# EAGLE board Panel EKO1 (EAGLE 5.10), part 1 of 2
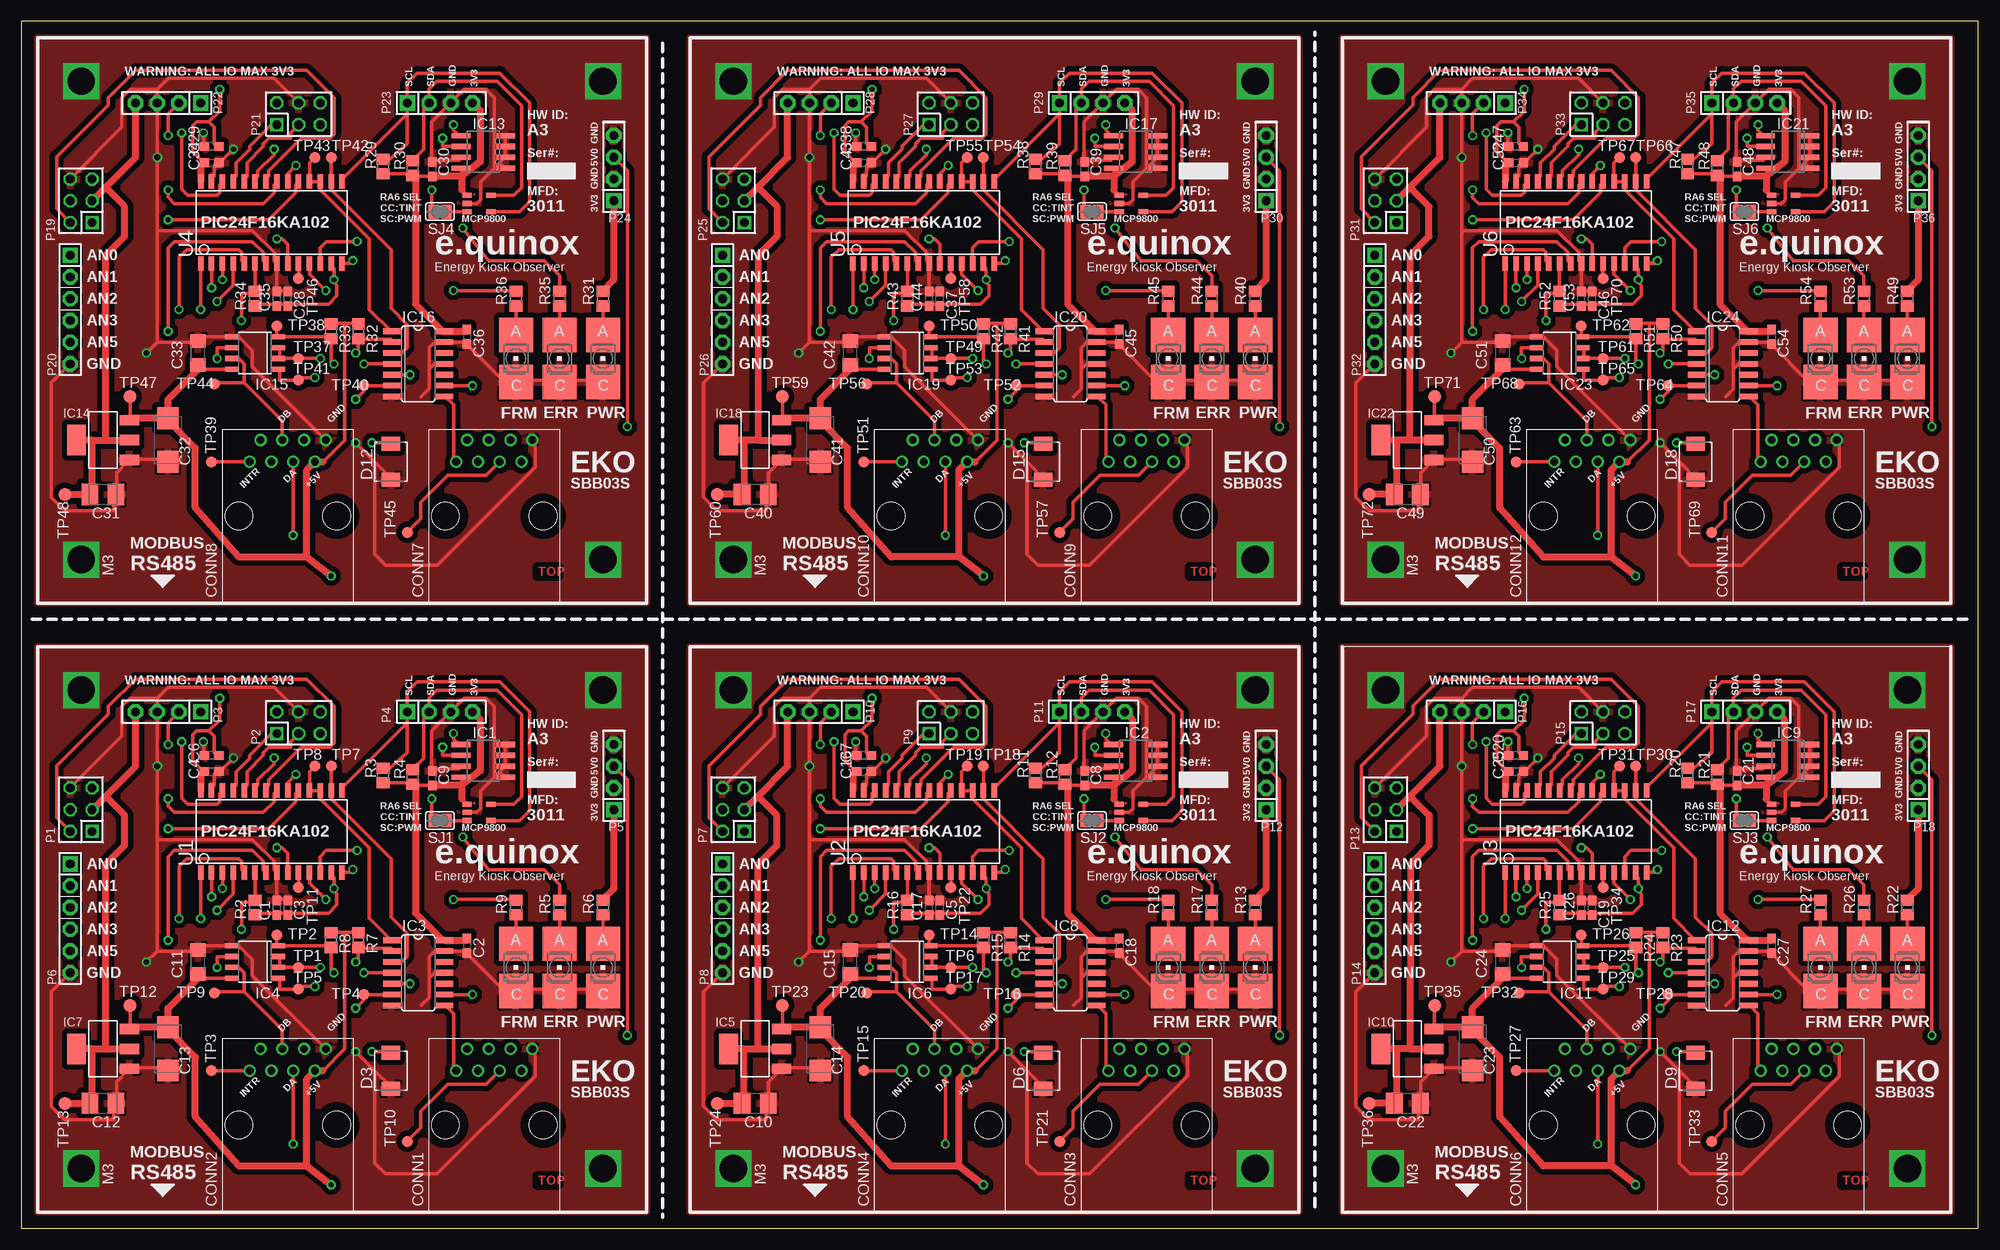
[diagram p0: board, top side]
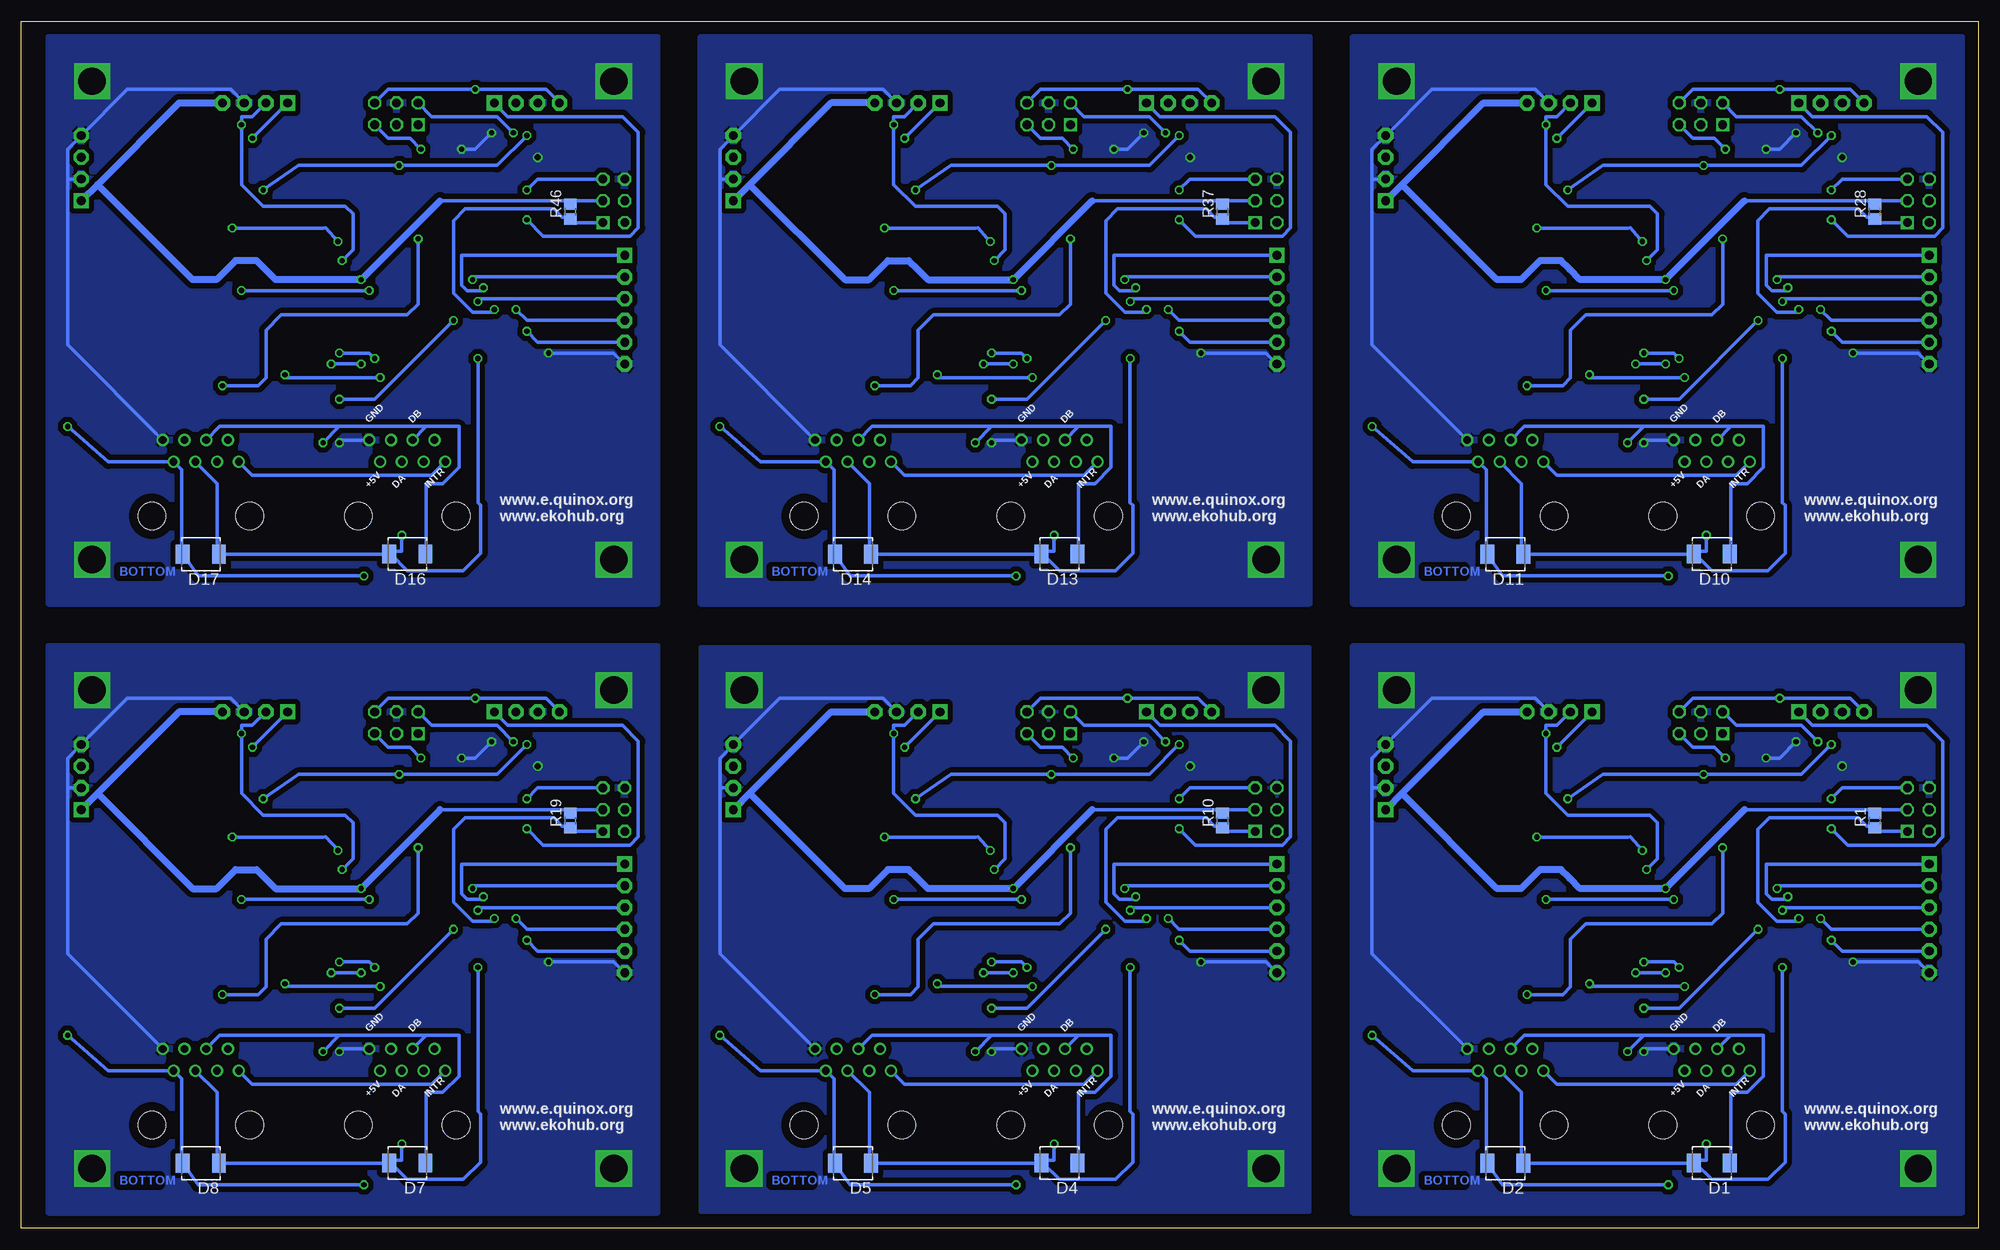
[diagram p1: board, bottom side, seen from below]

Size 228.6 x 140.97 mm. Coordinates in mm from the lower left corner, seen from the top.
Outline: 0,0 228.6,0 228.6,140.97 0,140.97 0,0
Copper layers (1*16): Top 0.035mm / dielectric 1.5mm / Bottom 0.035mm
Design rules "default": minimum track width 10mil, minimum drill 24mil, track to track 8mil, track to pad 8mil, pad to pad 8mil, via to via 8mil, smd to smd 8mil, copper to edge 40mil, drill to drill 8mil, minimum pad ring 10mil, minimum via ring 8mil, stop-mask expansion 4mil, vias tented up to drill 0mil, thermal gap 10mil

## Footprints (pad centres in the part's own frame; a part is rotated, then mirrored left to right if it is on the bottom)
C0603 = smd 1.1 x 1: 1 -0.85,0; 2 0.85,0
B/3528-21R = smd 1.95 x 2.5: + 1.525,0; - -1.525,0
C1206 = smd 1.6 x 1.8: 1 -1.4,0; 2 1.4,0
C/6032-28R = smd 2.55 x 2.5: + 2.525,0; - -2.525,0
MHRJJ8NFRA = drill 0.9 round: P$1 -4.445,6.35; P$2 -3.175,8.89; P$3 -1.905,6.35; P$4 -0.635,8.89; P$5 0.635,6.35; P$6 1.905,8.89; P$7 3.175,6.35; P$8 4.445,8.89 | hole 3.25: -5.715,0; 5.715,0
SMB = smd 1.62 x 2.18: 1 -2.11,0; 2 2.11,0
SO-08 = smd 0.6 x 2.2: 1 -1.905,-2.6; 2 -0.635,-2.6; 3 0.635,-2.6; 4 1.905,-2.6; 5 1.905,2.6; 6 0.635,2.6; 7 -0.635,2.6; 8 -1.905,2.6
SO14 = smd 0.66 x 2.032: 1 -3.81,-3.073; 2 -2.54,-3.073; 3 -1.27,-3.073; 4 0,-3.073; 5 1.27,-3.073; 6 2.54,-3.073; 7 3.81,-3.073; 8 3.81,3.073; 9 2.54,3.073; 10 1.27,3.073; 11 0,3.073; 12 -1.27,3.073; 13 -2.54,3.073; 14 -3.81,3.073
D_R-PDSO-G8 = smd 0.6 x 1.5: 1 -1.905,-2.75; 2 -0.635,-2.75; 3 0.635,-2.75; 4 1.905,-2.75; 5 1.905,2.75; 6 0.635,2.75; 7 -0.635,2.75; 8 -1.905,2.75
SOT223 = smd 1.219 x 2.235: 1 -2.311,-3.099; 2 0,-3.099; 3 2.311,-3.099 | smd 3.6 x 2.2: 4 0,3.099
P-LCC-2 = smd 4 x 4: A 0,2.75; C 0,-2.75
DIL-100-2X03 = drill 1.016 square: 1 -2.54,-1.27 | drill 1.016 octagon: 2 -2.54,1.27; 3 0,-1.27; 4 0,1.27; 5 2.54,-1.27; 6 2.54,1.27
SIP-100-04-40 = drill 1.016 pad 1.778 square: 1 -3.81,0 | drill 1.016 pad 1.778 octagon: 2 -1.27,0; 3 1.27,0; 4 3.81,0
SIP-100-06-40 = drill 1.016 pad 1.778 square: 1 -6.35,0 | drill 1.016 pad 1.778 octagon: 2 -3.81,0; 3 -1.27,0; 4 1.27,0; 5 3.81,0; 6 6.35,0
R0805 = smd 1.3 x 1.5: 1 -0.85,0; 2 0.85,0
SJ = smd 1.168 x 1.6: 1 -0.762,0; 2 0.762,0
TP13R = smd 1.3 x 1.3: TP 0,0
TP15R = smd 1.5 x 1.5: TP 0,0
SO28W = smd 0.65 x 1.7: 1 -7.62,-4.78; 2 -6.35,-4.78; 3 -5.08,-4.78; 4 -3.81,-4.78; 5 -2.54,-4.78; 6 -1.27,-4.78; 7 0,-4.78; 8 1.27,-4.78; 9 2.54,-4.78; 10 3.81,-4.78; 11 5.08,-4.78; 12 6.35,-4.78; 13 7.62,-4.78; 14 8.89,-4.78; 15 8.89,4.78; 16 7.62,4.78; 17 6.35,4.78; 18 5.08,4.78; 19 3.81,4.78; 20 2.54,4.78; 21 1.27,4.78; 22 0,4.78; 23 -1.27,4.78; 24 -2.54,4.78; 25 -3.81,4.78; 26 -5.08,4.78; 27 -6.35,4.78; 28 -7.62,4.78
SOT-23-5 = smd 0.6 x 1.1: ALERT 1.9,0; GND 0.95,0; SCLK 1.9,2.8; SDA 0,2.8; VDD 0,0

## Placement (x,y rotation side)
C1  [C0603]  29.84,37.47 90 top
C2  [C0603]  52.07,33.02 270 top
C3  [C0603]  31.11,37.47 90 top
C4  [C0603]  22.23,53.34 0 top
C5  [C0603]  107.31,37.47 90 top
C6  [C0603]  22.23,55.24 180 top
C7  [C0603]  98.42,55.24 180 top
C8  [C0603]  124.23,52.59 90 top
C9  [C0603]  48.03,52.59 90 top
C10  100uF  [B/3528-21R]  85.72,14.61 180 top
C11  0.1uF  [C1206]  20.64,31.11 90 top
C12  100uF  [B/3528-21R]  9.53,14.61 180 top
C13  10uF  [C/6032-28R]  17.14,20.95 90 top
C14  10uF  [C/6032-28R]  93.34,20.95 90 top
C15  0.1uF  [C1206]  96.84,31.11 90 top
C16  [C0603]  98.42,53.34 0 top
C17  [C0603]  106.05,37.47 90 top
C18  [C0603]  128.27,33.02 270 top
C19  [C0603]  183.51,37.47 90 top
C20  [C0603]  174.62,55.24 180 top
C21  [C0603]  200.43,52.59 90 top
C22  100uF  [B/3528-21R]  161.93,14.61 180 top
C23  10uF  [C/6032-28R]  169.54,20.95 90 top
C24  0.1uF  [C1206]  173.04,31.11 90 top
C25  [C0603]  174.62,53.34 0 top
C26  [C0603]  182.25,37.47 90 top
C27  [C0603]  204.47,33.02 270 top
C28  [C0603]  31.11,108.58 90 top
C29  [C0603]  22.23,126.36 180 top
C30  [C0603]  48.03,123.71 90 top
C31  100uF  [B/3528-21R]  9.53,85.72 180 top
C32  10uF  [C/6032-28R]  17.14,92.08 90 top
C33  0.1uF  [C1206]  20.64,102.23 90 top
C34  [C0603]  22.23,124.46 0 top
C35  [C0603]  29.84,108.58 90 top
C36  [C0603]  52.07,104.14 270 top
C37  [C0603]  107.31,108.58 90 top
C38  [C0603]  98.42,126.36 180 top
C39  [C0603]  124.23,123.71 90 top
C40  100uF  [B/3528-21R]  85.72,85.72 180 top
C41  10uF  [C/6032-28R]  93.34,92.08 90 top
C42  0.1uF  [C1206]  96.84,102.23 90 top
C43  [C0603]  98.42,124.46 0 top
C44  [C0603]  106.05,108.58 90 top
C45  [C0603]  128.27,104.14 270 top
C46  [C0603]  183.51,108.58 90 top
C47  [C0603]  174.62,126.36 180 top
C48  [C0603]  200.43,123.71 90 top
C49  100uF  [B/3528-21R]  161.93,85.72 180 top
C50  10uF  [C/6032-28R]  169.54,92.08 90 top
C51  0.1uF  [C1206]  173.04,102.23 90 top
C52  [C0603]  174.62,124.46 0 top
C53  [C0603]  182.25,108.58 90 top
C54  [C0603]  204.47,104.14 270 top
CONN1  MHRJJ88NFRA  [MHRJJ8NFRA]  55.24,12.06 0 top
CONN2  MHRJJ88NFRA  [MHRJJ8NFRA]  31.11,12.06 0 top
CONN3  MHRJJ88NFRA  [MHRJJ8NFRA]  131.44,12.06 0 top
CONN4  MHRJJ88NFRA  [MHRJJ8NFRA]  107.31,12.06 0 top
CONN5  MHRJJ88NFRA  [MHRJJ8NFRA]  207.65,12.06 0 top
CONN6  MHRJJ88NFRA  [MHRJJ8NFRA]  183.51,12.06 0 top
CONN7  MHRJJ88NFRA  [MHRJJ8NFRA]  55.24,83.19 0 top
CONN8  MHRJJ88NFRA  [MHRJJ8NFRA]  31.11,83.19 0 top
CONN9  MHRJJ88NFRA  [MHRJJ8NFRA]  131.44,83.19 0 top
CONN10  MHRJJ88NFRA  [MHRJJ8NFRA]  107.31,83.19 0 top
CONN11  MHRJJ88NFRA  [MHRJJ8NFRA]  207.65,83.19 0 top
CONN12  MHRJJ88NFRA  [MHRJJ8NFRA]  183.51,83.19 0 top
D1  P6SMB12CA  [SMB]  31.12,7.63 180 bottom
D2  P6SMB12CA  [SMB]  55.23,7.61 180 bottom
D3  P6SMB12CA  [SMB]  43.18,18.41 90 top
D4  P6SMB12CA  [SMB]  107.32,7.63 180 bottom
D5  P6SMB12CA  [SMB]  131.43,7.61 180 bottom
D6  P6SMB12CA  [SMB]  119.38,18.41 90 top
D7  P6SMB12CA  [SMB]  183.52,7.63 180 bottom
D8  P6SMB12CA  [SMB]  207.63,7.61 180 bottom
D9  P6SMB12CA  [SMB]  195.58,18.41 90 top
D10  P6SMB12CA  [SMB]  31.12,78.75 180 bottom
D11  P6SMB12CA  [SMB]  55.23,78.73 180 bottom
D12  P6SMB12CA  [SMB]  43.18,89.53 90 top
D13  P6SMB12CA  [SMB]  107.32,78.75 180 bottom
D14  P6SMB12CA  [SMB]  131.43,78.73 180 bottom
D15  P6SMB12CA  [SMB]  119.38,89.53 90 top
D16  P6SMB12CA  [SMB]  183.52,78.75 180 bottom
D17  P6SMB12CA  [SMB]  207.63,78.73 180 bottom
D18  P6SMB12CA  [SMB]  195.58,89.53 90 top
IC1  24AA01SN  [SO-08]  53.98,54.61 90 top
IC2  24AA01SN  [SO-08]  130.18,54.61 90 top
IC3  7407D  [SO14]  46.35,29.84 270 top
IC4  SP483E  [D_R-PDSO-G8]  27.3,31.11 90 top
IC5  TLV1117  [SOT223]  85.72,20.95 90 top
IC6  SP483E  [D_R-PDSO-G8]  103.5,31.11 90 top
IC7  TLV1117  [SOT223]  9.53,20.95 90 top
IC8  7407D  [SO14]  122.56,29.84 270 top
IC9  24AA01SN  [SO-08]  206.38,54.61 90 top
IC10  TLV1117  [SOT223]  161.93,20.95 90 top
IC11  SP483E  [D_R-PDSO-G8]  179.71,31.11 90 top
IC12  7407D  [SO14]  198.75,29.84 270 top
IC13  24AA01SN  [SO-08]  53.98,125.73 90 top
IC14  TLV1117  [SOT223]  9.53,92.08 90 top
IC15  SP483E  [D_R-PDSO-G8]  27.3,102.23 90 top
IC16  7407D  [SO14]  46.35,100.97 270 top
IC17  24AA01SN  [SO-08]  130.18,125.73 90 top
IC18  TLV1117  [SOT223]  85.72,92.08 90 top
IC19  SP483E  [D_R-PDSO-G8]  103.5,102.23 90 top
IC20  7407D  [SO14]  122.56,100.97 270 top
IC21  24AA01SN  [SO-08]  206.38,125.73 90 top
IC22  TLV1117  [SOT223]  161.93,92.08 90 top
IC23  SP483E  [D_R-PDSO-G8]  179.71,102.23 90 top
IC24  7407D  [SO14]  198.75,100.97 270 top
LED1  RED  [P-LCC-2]  62.87,30.48 0 top
LED2  AMBER  [P-LCC-2]  57.78,30.48 0 top
LED3  GREEN  [P-LCC-2]  144.15,30.48 0 top
LED4  RED  [P-LCC-2]  139.06,30.48 0 top
LED5  AMBER  [P-LCC-2]  133.99,30.48 0 top
LED6  GREEN  [P-LCC-2]  220.34,30.48 0 top
LED7  RED  [P-LCC-2]  215.26,30.48 0 top
LED8  GREEN  [P-LCC-2]  67.94,30.48 0 top
LED9  AMBER  [P-LCC-2]  210.19,30.48 0 top
LED10  GREEN  [P-LCC-2]  67.94,101.6 0 top
LED11  RED  [P-LCC-2]  62.87,101.6 0 top
LED12  AMBER  [P-LCC-2]  57.78,101.6 0 top
LED13  GREEN  [P-LCC-2]  144.15,101.6 0 top
LED14  RED  [P-LCC-2]  139.06,101.6 0 top
LED15  AMBER  [P-LCC-2]  133.99,101.6 0 top
LED16  GREEN  [P-LCC-2]  220.34,101.6 0 top
LED17  RED  [P-LCC-2]  215.26,101.6 0 top
LED18  AMBER  [P-LCC-2]  210.19,101.6 0 top
P1  ICSP  [DIL-100-2X03]  6.99,48.9 90 top
P2  ANALOG IN 2  [DIL-100-2X03]  32.38,59.05 0 top
P3  COMP  [SIP-100-04-40]  17.14,60.33 180 top
P4  I2C1  [SIP-100-04-40]  48.9,60.33 0 top
P5  PWR  [SIP-100-04-40]  69.22,52.7 90 top
P6  ANALOG IN  [SIP-100-06-40]  5.71,36.2 270 top
P7  ICSP  [DIL-100-2X03]  83.19,48.9 90 top
P8  ANALOG IN  [SIP-100-06-40]  81.92,36.2 270 top
P9  ANALOG IN 2  [DIL-100-2X03]  108.58,59.05 0 top
P10  COMP  [SIP-100-04-40]  93.34,60.33 180 top
P11  I2C1  [SIP-100-04-40]  125.09,60.33 0 top
P12  PWR  [SIP-100-04-40]  145.41,52.7 90 top
P13  ICSP  [DIL-100-2X03]  159.38,48.9 90 top
P14  ANALOG IN  [SIP-100-06-40]  158.12,36.2 270 top
P15  ANALOG IN 2  [DIL-100-2X03]  184.78,59.05 0 top
P16  COMP  [SIP-100-04-40]  169.54,60.33 180 top
P17  I2C1  [SIP-100-04-40]  201.29,60.33 0 top
P18  PWR  [SIP-100-04-40]  221.62,52.7 90 top
P19  ICSP  [DIL-100-2X03]  6.99,120.02 90 top
P20  ANALOG IN  [SIP-100-06-40]  5.71,107.31 270 top
P21  ANALOG IN 2  [DIL-100-2X03]  32.38,130.18 0 top
P22  COMP  [SIP-100-04-40]  17.14,131.44 180 top
P23  I2C1  [SIP-100-04-40]  48.9,131.44 0 top
P24  PWR  [SIP-100-04-40]  69.22,123.83 90 top
P25  ICSP  [DIL-100-2X03]  83.19,120.02 90 top
P26  ANALOG IN  [SIP-100-06-40]  81.92,107.31 270 top
P27  ANALOG IN 2  [DIL-100-2X03]  108.58,130.18 0 top
P28  COMP  [SIP-100-04-40]  93.34,131.44 180 top
P29  I2C1  [SIP-100-04-40]  125.09,131.44 0 top
P30  PWR  [SIP-100-04-40]  145.41,123.83 90 top
P31  ICSP  [DIL-100-2X03]  159.38,120.02 90 top
P32  ANALOG IN  [SIP-100-06-40]  158.12,107.31 270 top
P33  ANALOG IN 2  [DIL-100-2X03]  184.78,130.18 0 top
P34  COMP  [SIP-100-04-40]  169.54,131.44 180 top
P35  I2C1  [SIP-100-04-40]  201.29,131.44 0 top
P36  PWR  [SIP-100-04-40]  221.62,123.83 90 top
R1  10k  [R0805]  12.06,47.62 90 bottom
R2  2.7K  [R0805]  27.3,37.47 90 top
R3  [R0805]  42.27,52.91 270 top
R4  [R0805]  45.72,52.7 270 top
R5  390  [R0805]  62.87,37.47 90 top
R6  390  [R0805]  67.94,37.47 90 top
R7  4.7k  [R0805]  39.37,33.66 270 top
R8  4.7k  [R0805]  36.2,33.66 270 top
R9  390  [R0805]  57.78,37.47 90 top
R10  10k  [R0805]  88.27,47.62 90 bottom
R11  [R0805]  118.47,52.91 270 top
R12  [R0805]  121.92,52.7 270 top
R13  390  [R0805]  144.15,37.47 90 top
R14  4.7k  [R0805]  115.57,33.66 270 top
R15  4.7k  [R0805]  112.39,33.66 270 top
R16  2.7K  [R0805]  103.5,37.47 90 top
R17  390  [R0805]  139.06,37.47 90 top
R18  390  [R0805]  133.99,37.47 90 top
R19  10k  [R0805]  164.47,47.62 90 bottom
R20  [R0805]  194.67,52.91 270 top
R21  [R0805]  198.12,52.7 270 top
R22  390  [R0805]  220.34,37.47 90 top
R23  4.7k  [R0805]  191.77,33.66 270 top
R24  4.7k  [R0805]  188.59,33.66 270 top
R25  2.7K  [R0805]  179.71,37.47 90 top
R26  390  [R0805]  215.26,37.47 90 top
R27  390  [R0805]  210.19,37.47 90 top
R28  10k  [R0805]  12.06,118.75 90 bottom
R29  [R0805]  42.27,124.03 270 top
R30  [R0805]  45.72,123.83 270 top
R31  390  [R0805]  67.94,108.58 90 top
R32  4.7k  [R0805]  39.37,104.78 270 top
R33  4.7k  [R0805]  36.2,104.78 270 top
R34  2.7K  [R0805]  27.3,108.58 90 top
R35  390  [R0805]  62.87,108.58 90 top
R36  390  [R0805]  57.78,108.58 90 top
R37  10k  [R0805]  88.27,118.75 90 bottom
R38  [R0805]  118.47,124.03 270 top
R39  [R0805]  121.92,123.83 270 top
R40  390  [R0805]  144.15,108.58 90 top
R41  4.7k  [R0805]  115.57,104.78 270 top
R42  4.7k  [R0805]  112.39,104.78 270 top
R43  2.7K  [R0805]  103.5,108.58 90 top
R44  390  [R0805]  139.06,108.58 90 top
R45  390  [R0805]  133.99,108.58 90 top
R46  10k  [R0805]  164.47,118.75 90 bottom
R47  [R0805]  194.67,124.03 270 top
R48  [R0805]  198.12,123.83 270 top
R49  390  [R0805]  220.34,108.58 90 top
R50  4.7k  [R0805]  191.77,104.78 270 top
R51  4.7k  [R0805]  188.59,104.78 270 top
R52  2.7K  [R0805]  179.71,108.58 90 top
R53  390  [R0805]  215.26,108.58 90 top
R54  390  [R0805]  210.19,108.58 90 top
SJ1  [SJ]  48.9,47.62 0 top
SJ2  [SJ]  125.09,47.62 0 top
SJ3  [SJ]  201.29,47.62 0 top
SJ4  [SJ]  48.9,118.75 0 top
SJ5  [SJ]  125.09,118.75 0 top
SJ6  [SJ]  201.29,118.75 0 top
TP1  TPTP13R  [TP13R]  32.38,30.48 0 top
TP2  TPTP13R  [TP13R]  29.84,34.29 0 top
TP3  TPTP13R  [TP13R]  22.23,18.41 0 top
TP4  TPTP13R  [TP13R]  40.01,27.3 0 top
TP5  TPTP13R  [TP13R]  32.38,27.94 0 top
TP6  TPTP13R  [TP13R]  108.58,30.48 0 top
TP7  TPTP13R  [TP13R]  36.2,53.98 0 top
TP8  TPTP13R  [TP13R]  34.29,53.98 0 top
TP9  TPTP13R  [TP13R]  22.56,27.48 0 top
TP10  TPTP13R  [TP13R]  45.09,10.16 0 top
TP11  TPTP13R  [TP13R]  32.38,39.8 0 top
TP12  TPTP15R  [TP15R]  12.7,26.04 0 top
TP13  3V3  [TP15R]  5.08,14.61 0 top
TP14  TPTP13R  [TP13R]  106.05,34.29 0 top
TP15  TPTP13R  [TP13R]  98.42,18.41 0 top
TP16  TPTP13R  [TP13R]  116.2,27.3 0 top
TP17  TPTP13R  [TP13R]  108.58,27.94 0 top
TP18  TPTP13R  [TP13R]  112.39,53.98 0 top
TP19  TPTP13R  [TP13R]  110.49,53.98 0 top
TP20  TPTP13R  [TP13R]  98.76,27.48 0 top
TP21  TPTP13R  [TP13R]  121.28,10.16 0 top
TP22  TPTP13R  [TP13R]  108.58,39.8 0 top
TP23  TPTP15R  [TP15R]  88.9,26.04 0 top
TP24  3V3  [TP15R]  81.28,14.61 0 top
TP25  TPTP13R  [TP13R]  184.78,30.48 0 top
TP26  TPTP13R  [TP13R]  182.25,34.29 0 top
TP27  TPTP13R  [TP13R]  174.62,18.41 0 top
TP28  TPTP13R  [TP13R]  192.41,27.3 0 top
TP29  TPTP13R  [TP13R]  184.78,27.94 0 top
TP30  TPTP13R  [TP13R]  188.59,53.98 0 top
TP31  TPTP13R  [TP13R]  186.69,53.98 0 top
TP32  TPTP13R  [TP13R]  174.96,27.48 0 top
TP33  TPTP13R  [TP13R]  197.49,10.16 0 top
TP34  TPTP13R  [TP13R]  184.78,39.8 0 top
TP35  TPTP15R  [TP15R]  165.1,26.04 0 top
TP36  3V3  [TP15R]  157.48,14.61 0 top
TP37  TPTP13R  [TP13R]  32.38,101.6 0 top
TP38  TPTP13R  [TP13R]  29.84,105.41 0 top
TP39  TPTP13R  [TP13R]  22.23,89.53 0 top
TP40  TPTP13R  [TP13R]  40.01,98.42 0 top
TP41  TPTP13R  [TP13R]  32.38,99.06 0 top
TP42  TPTP13R  [TP13R]  36.2,125.09 0 top
TP43  TPTP13R  [TP13R]  34.29,125.09 0 top
TP44  TPTP13R  [TP13R]  22.56,98.6 0 top
TP45  TPTP13R  [TP13R]  45.09,81.28 0 top
TP46  TPTP13R  [TP13R]  32.38,110.92 0 top
TP47  TPTP15R  [TP15R]  12.7,97.16 0 top
TP48  3V3  [TP15R]  5.08,85.72 0 top
TP49  TPTP13R  [TP13R]  108.58,101.6 0 top
TP50  TPTP13R  [TP13R]  106.05,105.41 0 top
TP51  TPTP13R  [TP13R]  98.42,89.53 0 top
TP52  TPTP13R  [TP13R]  116.2,98.42 0 top
TP53  TPTP13R  [TP13R]  108.58,99.06 0 top
TP54  TPTP13R  [TP13R]  112.39,125.09 0 top
TP55  TPTP13R  [TP13R]  110.49,125.09 0 top
TP56  TPTP13R  [TP13R]  98.76,98.6 0 top
TP57  TPTP13R  [TP13R]  121.28,81.28 0 top
TP58  TPTP13R  [TP13R]  108.58,110.92 0 top
TP59  TPTP15R  [TP15R]  88.9,97.16 0 top
TP60  3V3  [TP15R]  81.28,85.72 0 top
TP61  TPTP13R  [TP13R]  184.78,101.6 0 top
TP62  TPTP13R  [TP13R]  182.25,105.41 0 top
TP63  TPTP13R  [TP13R]  174.62,89.53 0 top
TP64  TPTP13R  [TP13R]  192.41,98.42 0 top
TP65  TPTP13R  [TP13R]  184.78,99.06 0 top
TP66  TPTP13R  [TP13R]  188.59,125.09 0 top
TP67  TPTP13R  [TP13R]  186.69,125.09 0 top
TP68  TPTP13R  [TP13R]  174.96,98.6 0 top
TP69  TPTP13R  [TP13R]  197.49,81.28 0 top
TP70  TPTP13R  [TP13R]  184.78,110.92 0 top
TP71  TPTP15R  [TP15R]  165.1,97.16 0 top
TP72  3V3  [TP15R]  157.48,85.72 0 top
U1  PIC24F16KA102-I/SPSOIC  [SO28W]  28.57,46.35 0 top
U2  PIC24F16KA102-I/SPSOIC  [SO28W]  104.78,46.35 0 top
U3  PIC24F16KA102-I/SPSOIC  [SO28W]  180.97,46.35 0 top
U4  PIC24F16KA102-I/SPSOIC  [SO28W]  28.57,117.47 0 top
U5  PIC24F16KA102-I/SPSOIC  [SO28W]  104.78,117.47 0 top
U6  PIC24F16KA102-I/SPSOIC  [SO28W]  180.97,117.47 0 top
U$1  MCP9800  [SOT-23-5]  52.07,49.53 270 top
U$2  MCP9800  [SOT-23-5]  128.27,49.53 270 top
U$3  MCP9800  [SOT-23-5]  204.47,49.53 270 top
U$4  MCP9800  [SOT-23-5]  52.07,120.65 270 top
U$5  MCP9800  [SOT-23-5]  128.27,120.65 270 top
U$6  MCP9800  [SOT-23-5]  204.47,120.65 270 top

## Library data of the parts
C1-C54 R1-R54 = resistor
CONN1-CONN12 U1-U6 = eko-parts
D1-D18 = _hhn_suppressor_SMAJ_SM6T_P6SMB
IC1 IC2 IC9 IC13 IC17 IC21 = microchip; MF: MICROCHIP; MPN: 24AA01/SN; OC_FARNELL: 1331268; OC_NEWARK: 89C9792
IC3 IC8 IC12 IC16 IC20 IC24 = 74xx-eu
IC4 IC6 IC11 IC15 IC19 IC23 = 751xx
IC5 IC7 IC10 IC14 IC18 IC22 = SparkFun
LED1-LED18 = led
P1-P36 = con-headers-jp
SJ1-SJ6 = jumper
TP1-TP72 = testpad
U$1-U$6 = atmospheric

## Nets
0V: C1.2 C2.2 C3.2 C4.2 C6.2 C9.2 C11.2 C12.- C13.- CONN1.P$8 CONN2.P$8 D3.1 IC1.1 IC1.2 IC1.3 IC1.4 IC1.7 IC3.7 IC3.11 IC3.13 IC4.5 IC7.1 LED1.C LED2.C LED8.C P1.6 P2.4 P3.3 P4.3 P5.2 P5.4 P6.6 U1.8 U1.27 U$1.GND
0V1: C5.2 C7.2 C8.2 C10.- C14.- C15.2 C16.2 C17.2 C18.2 CONN3.P$8 CONN4.P$8 D6.1 IC2.1 IC2.2 IC2.3 IC2.4 IC2.7 IC5.1 IC6.5 IC8.7 IC8.11 IC8.13 LED3.C LED4.C LED5.C P7.6 P8.6 P9.4 P10.3 P11.3 P12.2 P12.4 U2.8 U2.27 U$2.GND
0V2: C19.2 C20.2 C21.2 C22.- C23.- C24.2 C25.2 C26.2 C27.2 CONN5.P$8 CONN6.P$8 D9.1 IC9.1 IC9.2 IC9.3 IC9.4 IC9.7 IC10.1 IC11.5 IC12.7 IC12.11 IC12.13 LED6.C LED7.C LED9.C P13.6 P14.6 P15.4 P16.3 P17.3 P18.2 P18.4 U3.8 U3.27 U$3.GND
0V3: C28.2 C29.2 C30.2 C31.- C32.- C33.2 C34.2 C35.2 C36.2 CONN7.P$8 CONN8.P$8 D12.1 IC13.1 IC13.2 IC13.3 IC13.4 IC13.7 IC14.1 IC15.5 IC16.7 IC16.11 IC16.13 LED10.C LED11.C LED12.C P19.6 P20.6 P21.4 P22.3 P23.3 P24.2 P24.4 U4.8 U4.27 U$4.GND
0V4: C37.2 C38.2 C39.2 C40.- C41.- C42.2 C43.2 C44.2 C45.2 CONN9.P$8 CONN10.P$8 D15.1 IC17.1 IC17.2 IC17.3 IC17.4 IC17.7 IC18.1 IC19.5 IC20.7 IC20.11 IC20.13 LED13.C LED14.C LED15.C P25.6 P26.6 P27.4 P28.3 P29.3 P30.2 P30.4 U5.8 U5.27 U$5.GND
0V5: C46.2 C47.2 C48.2 C49.- C50.- C51.2 C52.2 C53.2 C54.2 CONN11.P$8 CONN12.P$8 D18.1 IC21.1 IC21.2 IC21.3 IC21.4 IC21.7 IC22.1 IC23.5 IC24.7 IC24.11 IC24.13 LED16.C LED17.C LED18.C P31.6 P32.6 P33.4 P34.3 P35.3 P36.2 P36.4 U6.8 U6.27 U$6.GND
!MCLR!: P1.1 R1.1 U1.1
!MCLR!1: P7.1 R10.1 U2.1
!MCLR!2: P13.1 R19.1 U3.1
!MCLR!3: P19.1 R28.1 U4.1
!MCLR!4: P25.1 R37.1 U5.1
!MCLR!5: P31.1 R46.1 U6.1
!UART_RTS!: IC3.1 TP8.TP U1.17 U1.18
!UART_RTS!1: IC8.1 TP19.TP U2.17 U2.18
!UART_RTS!2: IC12.1 TP31.TP U3.17 U3.18
!UART_RTS!3: IC16.1 TP43.TP U4.17 U4.18
!UART_RTS!4: IC20.1 TP55.TP U5.17 U5.18
!UART_RTS!5: IC24.1 TP67.TP U6.17 U6.18
+3V1: C5.1 C7.1 C8.1 C10.+ C16.1 C17.1 C18.1 IC2.8 IC5.2 IC5.4 IC8.14 P7.3 P9.6 P10.4 P11.4 P12.1 R10.2 R11.2 R12.2 R13.2 R16.1 TP24.TP U2.13 U2.28 U$2.VDD
+3V2: C19.1 C20.1 C21.1 C22.+ C25.1 C26.1 C27.1 IC9.8 IC10.2 IC10.4 IC12.14 P13.3 P15.6 P16.4 P17.4 P18.1 R19.2 R20.2 R21.2 R22.2 R25.1 TP36.TP U3.13 U3.28 U$3.VDD
+3V3: C1.1 C2.1 C3.1 C4.1 C6.1 C9.1 C12.+ IC1.8 IC3.14 IC7.2 IC7.4 P1.3 P2.6 P3.4 P4.4 P5.1 R1.2 R2.1 R3.2 R4.2 R6.2 TP13.TP U1.13 U1.28 U$1.VDD
+3V4: C28.1 C29.1 C30.1 C31.+ C34.1 C35.1 C36.1 IC13.8 IC14.2 IC14.4 IC16.14 P19.3 P21.6 P22.4 P23.4 P24.1 R28.2 R29.2 R30.2 R31.2 R34.1 TP48.TP U4.13 U4.28 U$4.VDD
+3V5: C37.1 C38.1 C39.1 C40.+ C43.1 C44.1 C45.1 IC17.8 IC18.2 IC18.4 IC20.14 P25.3 P27.6 P28.4 P29.4 P30.1 R37.2 R38.2 R39.2 R40.2 R43.1 TP60.TP U5.13 U5.28 U$5.VDD
+3V6: C46.1 C47.1 C48.1 C49.+ C52.1 C53.1 C54.1 IC21.8 IC22.2 IC22.4 IC24.14 P31.3 P33.6 P34.4 P35.4 P36.1 R46.2 R47.2 R48.2 R49.2 R52.1 TP72.TP U6.13 U6.28 U$6.VDD
+5V: C11.1 C13.+ CONN1.P$7 CONN2.P$7 D2.2 IC4.8 IC7.3 P5.3 R7.1 R8.1 TP12.TP
+5V1: C14.+ C15.1 CONN3.P$7 CONN4.P$7 D5.2 IC5.3 IC6.8 P12.3 R14.1 R15.1 TP23.TP
+5V2: C23.+ C24.1 CONN5.P$7 CONN6.P$7 D8.2 IC10.3 IC11.8 P18.3 R23.1 R24.1 TP35.TP
+5V3: C32.+ C33.1 CONN7.P$7 CONN8.P$7 D11.2 IC14.3 IC15.8 P24.3 R32.1 R33.1 TP47.TP
+5V4: C41.+ C42.1 CONN9.P$7 CONN10.P$7 D14.2 IC18.3 IC19.8 P30.3 R41.1 R42.1 TP59.TP
+5V5: C50.+ C51.1 CONN11.P$7 CONN12.P$7 D17.2 IC22.3 IC23.8 P36.3 R50.1 R51.1 TP71.TP
AN0: P6.1 U1.2
AN1: P6.2 U1.3
AN2: P6.3 U1.4
AN3: P6.4 U1.5
AN4: P8.5 U2.7
AN5: P6.5 U1.7
AN6: P8.2 U2.3
AN7: P8.1 U2.2
AN8: P8.3 U2.4
AN9: P8.4 U2.5
AN10: P2.1 U1.25
AN11: P2.3 U1.24
AN12: P2.5 U1.23
AN13: P9.3 U2.24
AN14: P9.5 U2.23
AN15: P9.1 U2.25
AN16: P14.5 U3.7
AN17: P14.2 U3.3
AN18: P14.1 U3.2
AN19: P14.3 U3.4
AN20: P14.4 U3.5
AN21: P15.3 U3.24
AN22: P15.5 U3.23
AN23: P15.1 U3.25
AN24: P20.5 U4.7
AN25: P20.2 U4.3
AN26: P20.1 U4.2
AN27: P20.3 U4.4
AN28: P20.4 U4.5
AN29: P21.3 U4.24
AN30: P21.5 U4.23
AN31: P21.1 U4.25
AN32: P26.5 U5.7
AN33: P26.2 U5.3
AN34: P26.1 U5.2
AN35: P26.3 U5.4
AN36: P26.4 U5.5
AN37: P27.3 U5.24
AN38: P27.5 U5.23
AN39: P27.1 U5.25
AN40: P32.5 U6.7
AN41: P32.2 U6.3
AN42: P32.1 U6.2
AN43: P32.3 U6.4
AN44: P32.4 U6.5
AN45: P33.3 U6.24
AN46: P33.5 U6.23
AN47: P33.1 U6.25
BUS_INT1: IC3.9 U1.9
BUS_INT2: IC8.9 U2.9
BUS_INT3: IC12.9 U3.9
BUS_INT4: IC16.9 U4.9
BUS_INT5: IC20.9 U5.9
BUS_INT6: IC24.9 U6.9
DA: CONN1.P$5 CONN2.P$5 D1.2 D2.1 IC4.6 TP10.TP
DA1: CONN3.P$5 CONN4.P$5 D4.2 D5.1 IC6.6 TP21.TP
DA2: CONN5.P$5 CONN6.P$5 D7.2 D8.1 IC11.6 TP33.TP
DA3: CONN7.P$5 CONN8.P$5 D10.2 D11.1 IC15.6 TP45.TP
DA4: CONN9.P$5 CONN10.P$5 D13.2 D14.1 IC19.6 TP57.TP
DA5: CONN11.P$5 CONN12.P$5 D16.2 D17.1 IC23.6 TP69.TP
DB: CONN1.P$4 CONN2.P$4 D1.1 D3.2 IC4.7 TP9.TP
DB1: CONN3.P$4 CONN4.P$4 D4.1 D6.2 IC6.7 TP20.TP
DB2: CONN5.P$4 CONN6.P$4 D7.1 D9.2 IC11.7 TP32.TP
DB3: CONN7.P$4 CONN8.P$4 D10.1 D12.2 IC15.7 TP44.TP
DB4: CONN9.P$4 CONN10.P$4 D13.1 D15.2 IC19.7 TP56.TP
DB5: CONN11.P$4 CONN12.P$4 D16.1 D18.2 IC23.7 TP68.TP
IC1: P3.1 U1.19
IC2: P10.1 U2.19
IC3: P16.1 U3.19
IC4: P22.1 U4.19
IC5: P28.1 U5.19
IC6: P34.1 U6.19
INTR: CONN1.P$1 CONN2.P$1 IC3.8 TP3.TP
INTR1: CONN3.P$1 CONN4.P$1 IC8.8 TP15.TP
INTR2: CONN5.P$1 CONN6.P$1 IC12.8 TP27.TP
INTR3: CONN7.P$1 CONN8.P$1 IC16.8 TP39.TP
INTR4: CONN9.P$1 CONN10.P$1 IC20.8 TP51.TP
INTR5: CONN11.P$1 CONN12.P$1 IC24.8 TP63.TP
LED_1: R9.2 U1.11
LED_2: R5.2 U1.12
LED_3: R18.2 U2.11
LED_4: R17.2 U2.12
LED_5: R27.2 U3.11
LED_6: R26.2 U3.12
LED_7: R36.2 U4.11
LED_8: R35.2 U4.12
LED_9: R45.2 U5.11
LED_10: R44.2 U5.12
LED_11: R54.2 U6.11
LED_12: R53.2 U6.12
N$1: LED3.A R13.1
N$2: LED4.A R17.1
N$3: LED5.A R18.1
N$4: SJ1.2 U$1.ALERT
N$5: LED1.A R5.1
N$6: LED2.A R9.1
N$7: SJ2.2 U$2.ALERT
N$8: LED6.A R22.1
N$9: LED7.A R26.1
N$10: LED9.A R27.1
N$11: SJ3.2 U$3.ALERT
N$12: LED10.A R31.1
N$13: LED11.A R35.1
N$14: LED12.A R36.1
N$15: LED8.A R6.1
N$16: SJ4.2 U$4.ALERT
N$17: LED13.A R40.1
N$18: LED14.A R44.1
N$19: LED15.A R45.1
N$20: SJ5.2 U$5.ALERT
N$21: LED16.A R49.1
N$22: LED17.A R53.1
N$23: LED18.A R54.1
N$24: SJ6.2 U$6.ALERT
OC1: P3.2 SJ1.1 U1.20
OC2: P10.2 SJ2.1 U2.20
OC3: P16.2 SJ3.1 U3.20
OC4: P22.2 SJ4.1 U4.20
OC5: P28.2 SJ5.1 U5.20
OC6: P34.2 SJ6.1 U6.20
OSCO: TP11.TP U1.10
OSCO1: TP22.TP U2.10
OSCO2: TP34.TP U3.10
OSCO3: TP46.TP U4.10
OSCO4: TP58.TP U5.10
OSCO5: TP70.TP U6.10
PGC1: P7.2 U2.22
PGC2: P1.2 U1.22
PGC3: P13.2 U3.22
PGC4: P19.2 U4.22
PGC5: P25.2 U5.22
PGC6: P31.2 U6.22
PGD1: P7.5 U2.21
PGD2: P1.5 U1.21
PGD3: P13.5 U3.21
PGD4: P19.5 U4.21
PGD5: P25.5 U5.21
PGD6: P31.5 U6.21
RB1: P9.2 U2.26
RB2: P15.2 U3.26
RB3: P21.2 U4.26
RB4: P27.2 U5.26
RB5: P33.2 U6.26
RB15: P2.2 U1.26
SCL: IC1.6 P4.1 R3.1 U1.15 U$1.SCLK
SCL1: IC2.6 P11.1 R11.1 U2.15 U$2.SCLK
SCL2: IC9.6 P17.1 R20.1 U3.15 U$3.SCLK
SCL3: IC13.6 P23.1 R29.1 U4.15 U$4.SCLK
SCL4: IC17.6 P29.1 R38.1 U5.15 U$5.SCLK
SCL5: IC21.6 P35.1 R47.1 U6.15 U$6.SCLK
SDA: IC1.5 P4.2 R4.1 U1.14 U$1.SDA
SDA1: IC2.5 P11.2 R12.1 U2.14 U$2.SDA
SDA2: IC9.5 P17.2 R21.1 U3.14 U$3.SDA
SDA3: IC13.5 P23.2 R30.1 U4.14 U$4.SDA
SDA4: IC17.5 P29.2 R39.1 U5.14 U$5.SDA
SDA5: IC21.5 P35.2 R48.1 U6.14 U$6.SDA
UART_RTS_5V: IC3.2 IC4.2 IC4.3 R7.2 TP1.TP
UART_RTS_5V1: IC6.2 IC6.3 IC8.2 R14.2 TP6.TP
UART_RTS_5V2: IC11.2 IC11.3 IC12.2 R23.2 TP25.TP
UART_RTS_5V3: IC15.2 IC15.3 IC16.2 R32.2 TP37.TP
UART_RTS_5V4: IC19.2 IC19.3 IC20.2 R41.2 TP49.TP
UART_RTS_5V5: IC23.2 IC23.3 IC24.2 R50.2 TP61.TP
UART_RX: IC3.6 R2.2 TP4.TP U1.6
UART_RX1: IC8.6 R16.2 TP16.TP U2.6
UART_RX2: IC12.6 R25.2 TP28.TP U3.6
UART_RX3: IC16.6 R34.2 TP40.TP U4.6
UART_RX4: IC20.6 R43.2 TP52.TP U5.6
UART_RX5: IC24.6 R52.2 TP64.TP U6.6
UART_RX_5V: IC3.5 IC4.1 TP5.TP
UART_RX_5V1: IC6.1 IC8.5 TP17.TP
UART_RX_5V2: IC11.1 IC12.5 TP29.TP
UART_RX_5V3: IC15.1 IC16.5 TP41.TP
UART_RX_5V4: IC19.1 IC20.5 TP53.TP
UART_RX_5V5: IC23.1 IC24.5 TP65.TP
UART_TX: IC3.3 TP7.TP U1.16
UART_TX1: IC8.3 TP18.TP U2.16
UART_TX2: IC12.3 TP30.TP U3.16
UART_TX3: IC16.3 TP42.TP U4.16
UART_TX4: IC20.3 TP54.TP U5.16
UART_TX5: IC24.3 TP66.TP U6.16
UART_TX_5V: IC3.4 IC4.4 R8.2 TP2.TP
UART_TX_5V1: IC6.4 IC8.4 R15.2 TP14.TP
UART_TX_5V2: IC11.4 IC12.4 R24.2 TP26.TP
UART_TX_5V3: IC15.4 IC16.4 R33.2 TP38.TP
UART_TX_5V4: IC19.4 IC20.4 R42.2 TP50.TP
UART_TX_5V5: IC23.4 IC24.4 R51.2 TP62.TP

## Tracks (layer width: path | path; a pad name or v marks a point on that pad's centre or on a via)
0V  (via drill 0.61, 0.7, 3.2 pad 0.41)
  Top 0.406: IC1.7 51.12,53.98 51.12,53.66 48.58,53.66 C9.2 48.26,53.66 47.94,53.98 47.94,58.1 P4.3 51.75,61.91 54.29,61.91 55.24,60.96 55.24,52.7 | 56.52,55.24 56.52,56.52 IC1.4 | 55.88,53.34 56.52,53.98 | 55.24,52.7 55.88,53.34 | 55.24,52.7 53.66,51.12 53.66,49.03 53.21,48.58 U$1.GND | 55.88,53.34 56.52,52.7 IC1.1 | 56.52,53.98 56.52,55.24 | 56.52,55.24 IC1.3 | 56.52,53.98 IC1.2 | C13.- 17.14,18.73 12.7,18.73 IC7.1 12.38,18.41 11.11,17.14 11.11,14.61 C12.- 10.79,14.61 10.79,12.7 5.08,12.7 3.49,14.29 3.49,27.62 P6.6 | v39.05,20.64 41.27,18.41 | 41.27,18.41 43.18,16.51 D3.1 | 29.84,38.42 31.11,38.42 C3.2 | 29.84,38.42 C1.2 | 29.84,38.42 U1.8 29.84,41.59 29.53,41.91 29.53,42.86 26.99,45.4 15.88,45.4 | 15.88,45.4 v15.88,53.98 P3.3 15.88,61.91 | 15.88,32.38 20.64,32.38 C11.2 20.64,33.02 IC4.5 25.4,33.02 26.99,31.43 26.99,29.53 CONN2.P$8 | 15.88,32.38 15.88,45.4 | P1.6 11.75,57.47 11.75,60.96 12.7,61.91 15.88,61.91 | P2.4 29.53,63.18 17.14,63.18 15.88,61.91 | v14.61,31.11 15.88,32.38 | CONN1.P$8 60.01,20.64 60.01,17.78 48.58,6.35 42.55,6.35 41.27,7.62 41.27,18.41 | 67.94,27.94 56.2,27.94 52.07,32.07 C2.2 | 52.07,32.38 IC3.13 48.26,32.38 47.62,31.75 47.62,29.21 | 47.62,29.21 48.26,29.84 IC3.11 | 46.73,26.04 47.62,26.93 47.62,29.21 | U1.27 22.23,51.44 22.54,51.75 22.54,53.02 22.86,53.34 C4.2 23.18,53.34 v24.77,54.93 | v21.27,56.83 21.27,55.24 C6.2
  Bottom 0.406: CONN1.P$8 70.8,32.07 70.8,51.44 | 70.8,51.44 P5.2 | 70.8,51.44 70.8,54.93 P5.4 63.82,61.91 51.75,61.91 P4.3 | v39.05,20.64 38.73,20.95 CONN2.P$8 | P6.6 6.99,31.11 v14.61,31.11 | v21.27,56.83 23.18,54.93 v24.77,54.93
  other vias: 6.99,6.99 6.99,62.87 67.94,62.87 67.94,6.99
  pour Top (isolate 0.61): 1.91,67.94 73.03,67.94 73.03,1.91 1.91,1.91
  pour Bottom (isolate 0.61): 1.91,67.94 73.03,67.94 73.03,1.91 1.91,1.91
0V1  (via drill 0.61, 0.7, 3.2 pad 0.41)
  Top 0.406: IC2.7 127.32,53.98 127.32,53.66 124.78,53.66 C8.2 124.46,53.66 124.14,53.98 124.14,58.1 P11.3 127.95,61.91 130.49,61.91 131.44,60.96 131.44,52.7 | 132.72,55.24 132.72,56.52 IC2.4 | 132.08,53.34 132.72,53.98 | 131.44,52.7 132.08,53.34 | 131.44,52.7 129.86,51.12 129.86,49.03 129.41,48.58 U$2.GND | 132.08,53.34 132.72,52.7 IC2.1 | 132.72,53.98 132.72,55.24 | 132.72,55.24 IC2.3 | 132.72,53.98 IC2.2 | C14.- 93.34,18.73 88.9,18.73 IC5.1 88.58,18.41 87.31,17.14 87.31,14.61 C10.- 87,14.61 87,12.7 81.28,12.7 79.69,14.29 79.69,27.62 P8.6 | v115.25,20.64 117.47,18.41 | 117.47,18.41 119.38,16.51 D6.1 | 106.05,38.42 107.31,38.42 C5.2 | 106.05,38.42 C17.2 | 106.05,38.42 U2.8 106.05,41.59 105.73,41.91 105.73,42.86 103.19,45.4 92.08,45.4 | 92.08,45.4 v92.08,53.98 P10.3 92.08,61.91 | 92.08,32.38 96.84,32.38 C15.2 96.84,33.02 IC6.5 101.6,33.02 103.19,31.43 103.19,29.53 CONN4.P$8 | 92.08,32.38 92.08,45.4 | P7.6 87.95,57.47 87.95,60.96 88.9,61.91 92.08,61.91 | P9.4 105.73,63.18 93.34,63.18 92.08,61.91 | v90.81,31.11 92.08,32.38 | CONN3.P$8 136.21,20.64 136.21,17.78 124.78,6.35 118.75,6.35 117.47,7.62 117.47,18.41 | 144.15,27.94 132.4,27.94 128.27,32.07 C18.2 | 128.27,32.38 IC8.13 124.46,32.38 123.83,31.75 123.83,29.21 | 123.83,29.21 124.46,29.84 IC8.11 | 122.93,26.04 123.83,26.93 123.83,29.21 | U2.27 98.42,51.44 98.74,51.75 98.74,53.02 99.06,53.34 C16.2 99.38,53.34 v100.97,54.93 | v97.47,56.83 97.47,55.24 C7.2
  Bottom 0.406: CONN3.P$8 147,32.07 147,51.44 | 147,51.44 P12.2 | 147,51.44 147,54.93 P12.4 140.02,61.91 127.95,61.91 P11.3 | v115.25,20.64 114.94,20.95 CONN4.P$8 | P8.6 83.19,31.11 v90.81,31.11 | v97.47,56.83 99.38,54.93 v100.97,54.93
  other vias: 83.19,6.99 83.19,62.87 144.15,62.87 144.15,6.99
  pour Top (isolate 0.61): 78.11,67.94 149.22,67.94 149.22,1.91 78.11,1.91
  pour Bottom (isolate 0.61): 78.11,67.94 149.22,67.94 149.22,1.91 78.11,1.91
0V2  (via drill 0.61, 0.7, 3.2 pad 0.41)
  Top 0.406: IC9.7 203.52,53.98 203.52,53.66 200.98,53.66 C21.2 200.66,53.66 200.34,53.98 200.34,58.1 P17.3 204.15,61.91 206.69,61.91 207.65,60.96 207.65,52.7 | 208.91,55.24 208.91,56.52 IC9.4 | 208.28,53.34 208.91,53.98 | 207.65,52.7 208.28,53.34 | 207.65,52.7 206.06,51.12 206.06,49.03 205.61,48.58 U$3.GND | 208.28,53.34 208.91,52.7 IC9.1 | 208.91,53.98 208.91,55.24 | 208.91,55.24 IC9.3 | 208.91,53.98 IC9.2 | C23.- 169.54,18.73 165.1,18.73 IC10.1 164.78,18.41 163.51,17.14 163.51,14.61 C22.- 163.19,14.61 163.19,12.7 157.48,12.7 155.89,14.29 155.89,27.62 P14.6 | 193.68,18.41 v191.45,20.64 | 193.68,18.41 195.58,16.51 D9.1 | 182.25,38.42 183.51,38.42 C19.2 | 182.25,38.42 C26.2 | 182.25,38.42 U3.8 182.25,41.59 181.93,41.91 181.93,42.86 179.39,45.4 168.28,45.4 | 168.28,45.4 v168.28,53.98 P16.3 168.28,61.91 | 168.28,32.38 173.04,32.38 C24.2 173.04,33.02 IC11.5 177.8,33.02 179.39,31.43 179.39,29.53 CONN6.P$8 | 168.28,32.38 168.28,45.4 | P13.6 164.15,57.47 164.15,60.96 165.1,61.91 168.28,61.91 | P15.4 181.93,63.18 169.54,63.18 168.28,61.91 | 168.28,32.38 v167,31.11 | CONN5.P$8 212.41,20.64 212.41,17.78 200.98,6.35 194.94,6.35 193.68,7.62 193.68,18.41 | 220.34,27.94 208.6,27.94 204.47,32.07 C27.2 | 204.47,32.38 IC12.13 200.66,32.38 200.03,31.75 200.03,29.21 | 200.03,29.21 200.66,29.84 IC12.11 | 199.13,26.04 200.03,26.93 200.03,29.21 | U3.27 174.62,51.44 174.94,51.75 174.94,53.02 175.26,53.34 C25.2 175.58,53.34 v177.16,54.93 | v173.67,56.83 173.67,55.24 C20.2
  Bottom 0.406: CONN5.P$8 223.2,32.07 223.2,51.44 | 223.2,51.44 P18.2 | 223.2,51.44 223.2,54.93 P18.4 216.22,61.91 204.15,61.91 P17.3 | v191.45,20.64 191.13,20.95 CONN6.P$8 | P14.6 159.38,31.11 v167,31.11 | v173.67,56.83 175.58,54.93 v177.16,54.93
  other vias: 159.38,6.99 159.38,62.87 220.34,62.87 220.34,6.99
  pour Top (isolate 0.61): 154.31,67.94 225.43,67.94 225.43,1.91 154.31,1.91
  pour Bottom (isolate 0.61): 154.31,67.94 225.43,67.94 225.43,1.91 154.31,1.91
0V3  (via drill 0.61, 0.7, 3.2 pad 0.41)
  Top 0.406: IC13.7 51.12,125.09 51.12,124.78 48.58,124.78 C30.2 48.26,124.78 47.94,125.09 47.94,129.22 P23.3 51.75,133.03 54.29,133.03 55.24,132.08 55.24,123.83 | 56.52,126.36 56.52,127.64 IC13.4 | 55.88,124.46 56.52,125.09 | 55.24,123.83 55.88,124.46 | 55.24,123.83 53.66,122.24 53.66,120.15 53.21,119.7 U$4.GND | 55.88,124.46 56.52,123.83 IC13.1 | 56.52,125.09 56.52,126.36 | 56.52,126.36 IC13.3 | 56.52,125.09 IC13.2 | C32.- 17.14,89.85 12.7,89.85 IC14.1 12.38,89.53 11.11,88.27 11.11,85.72 C31.- 10.79,85.72 10.79,83.82 5.08,83.82 3.49,85.41 3.49,98.74 P20.6 | v39.05,91.76 41.27,89.53 | 41.27,89.53 43.18,87.63 D12.1 | 29.84,109.54 31.11,109.54 C28.2 | 29.84,109.54 C35.2 | 29.84,109.54 U4.8 29.84,112.71 29.53,113.03 29.53,113.98 26.99,116.52 15.88,116.52 | 15.88,116.52 v15.88,125.09 P22.3 15.88,133.03 | 15.88,103.5 20.64,103.5 C33.2 20.64,104.14 IC15.5 25.4,104.14 26.99,102.55 26.99,100.65 CONN8.P$8 | 15.88,103.5 15.88,116.52 | P19.6 11.75,128.59 11.75,132.08 12.7,133.03 15.88,133.03 | P21.4 29.53,134.3 17.14,134.3 15.88,133.03 | v14.61,102.23 15.88,103.5 | CONN7.P$8 60.01,91.76 60.01,88.9 48.58,77.47 42.55,77.47 41.27,78.74 41.27,89.53 | 67.94,99.06 56.2,99.06 52.07,103.19 C36.2 | 52.07,103.5 IC16.13 48.26,103.5 47.62,102.87 47.62,100.33 | 47.62,100.33 48.26,100.97 IC16.11 | 46.73,97.16 47.62,98.05 47.62,100.33 | U4.27 22.23,122.56 22.54,122.87 22.54,124.14 22.86,124.46 C34.2 23.18,124.46 v24.77,126.05 | v21.27,127.95 21.27,126.36 C29.2
  Bottom 0.406: CONN7.P$8 70.8,103.19 70.8,122.56 | 70.8,122.56 P24.2 | 70.8,122.56 70.8,126.05 P24.4 63.82,133.03 51.75,133.03 P23.3 | v39.05,91.76 38.73,92.08 CONN8.P$8 | P20.6 6.99,102.23 v14.61,102.23 | v21.27,127.95 23.18,126.05 v24.77,126.05
  other vias: 6.99,78.11 6.99,133.99 67.94,133.99 67.94,78.11
  pour Top (isolate 0.61): 1.91,139.06 73.03,139.06 73.03,73.03 1.91,73.03
  pour Bottom (isolate 0.61): 1.91,139.06 73.03,139.06 73.03,73.03 1.91,73.03
0V4  (via drill 0.61, 0.7, 3.2 pad 0.41)
  Top 0.406: IC17.7 127.32,125.09 127.32,124.78 124.78,124.78 C39.2 124.46,124.78 124.14,125.09 124.14,129.22 P29.3 127.95,133.03 130.49,133.03 131.44,132.08 131.44,123.83 | 132.72,126.36 132.72,127.64 IC17.4 | 132.08,124.46 132.72,125.09 | 131.44,123.83 132.08,124.46 | 131.44,123.83 129.86,122.24 129.86,120.15 129.41,119.7 U$5.GND | 132.08,124.46 132.72,123.83 IC17.1 | 132.72,125.09 132.72,126.36 | 132.72,126.36 IC17.3 | 132.72,125.09 IC17.2 | C41.- 93.34,89.85 88.9,89.85 IC18.1 88.58,89.53 87.31,88.27 87.31,85.72 C40.- 87,85.72 87,83.82 81.28,83.82 79.69,85.41 79.69,98.74 P26.6 | 117.47,89.53 v115.25,91.76 | 117.47,89.53 119.38,87.63 D15.1 | 106.05,109.54 107.31,109.54 C37.2 | 106.05,109.54 C44.2 | 106.05,109.54 U5.8 106.05,112.71 105.73,113.03 105.73,113.98 103.19,116.52 92.08,116.52 | 92.08,116.52 v92.08,125.09 P28.3 92.08,133.03 | 92.08,103.5 96.84,103.5 C42.2 96.84,104.14 IC19.5 101.6,104.14 103.19,102.55 103.19,100.65 CONN10.P$8 | 92.08,103.5 92.08,116.52 | P25.6 87.95,128.59 87.95,132.08 88.9,133.03 92.08,133.03 | P27.4 105.73,134.3 93.34,134.3 92.08,133.03 | 92.08,103.5 v90.81,102.23 | CONN9.P$8 136.21,91.76 136.21,88.9 124.78,77.47 118.75,77.47 117.47,78.74 117.47,89.53 | 144.15,99.06 132.4,99.06 128.27,103.19 C45.2 | 128.27,103.5 IC20.13 124.46,103.5 123.83,102.87 123.83,100.33 | 123.83,100.33 124.46,100.97 IC20.11 | 122.93,97.16 123.83,98.05 123.83,100.33 | U5.27 98.42,122.56 98.74,122.87 98.74,124.14 99.06,124.46 C43.2 99.38,124.46 v100.97,126.05 | v97.47,127.95 97.47,126.36 C38.2
  Bottom 0.406: CONN9.P$8 147,103.19 147,122.56 | 147,122.56 P30.2 | 147,122.56 147,126.05 P30.4 140.02,133.03 127.95,133.03 P29.3 | v115.25,91.76 114.94,92.08 CONN10.P$8 | P26.6 83.19,102.23 v90.81,102.23 | v97.47,127.95 99.38,126.05 v100.97,126.05
  other vias: 83.19,78.11 83.19,133.99 144.15,133.99 144.15,78.11
  pour Top (isolate 0.61): 78.11,139.06 149.22,139.06 149.22,73.03 78.11,73.03
  pour Bottom (isolate 0.61): 78.11,139.06 149.22,139.06 149.22,73.03 78.11,73.03
0V5  (via drill 0.61, 0.7, 3.2 pad 0.41)
  Top 0.406: IC21.7 203.52,125.09 203.52,124.78 200.98,124.78 C48.2 200.66,124.78 200.34,125.09 200.34,129.22 P35.3 204.15,133.03 206.69,133.03 207.65,132.08 207.65,123.83 | 208.91,126.36 208.91,127.64 IC21.4 | 208.28,124.46 208.91,125.09 | 207.65,123.83 208.28,124.46 | 207.65,123.83 206.06,122.24 206.06,120.15 205.61,119.7 U$6.GND | 208.28,124.46 208.91,123.83 IC21.1 | 208.91,125.09 208.91,126.36 | 208.91,126.36 IC21.3 | 208.91,125.09 IC21.2 | C50.- 169.54,89.85 165.1,89.85 IC22.1 164.78,89.53 163.51,88.27 163.51,85.72 C49.- 163.19,85.72 163.19,83.82 157.48,83.82 155.89,85.41 155.89,98.74 P32.6 | v191.45,91.76 193.68,89.53 | 193.68,89.53 195.58,87.63 D18.1 | 182.25,109.54 183.51,109.54 C46.2 | 182.25,109.54 C53.2 | 182.25,109.54 U6.8 182.25,112.71 181.93,113.03 181.93,113.98 179.39,116.52 168.28,116.52 | 168.28,116.52 v168.28,125.09 P34.3 168.28,133.03 | 168.28,103.5 173.04,103.5 C51.2 173.04,104.14 IC23.5 177.8,104.14 179.39,102.55 179.39,100.65 CONN12.P$8 | 168.28,103.5 168.28,116.52 | P31.6 164.15,128.59 164.15,132.08 165.1,133.03 168.28,133.03 | P33.4 181.93,134.3 169.54,134.3 168.28,133.03 | v167,102.23 168.28,103.5 | CONN11.P$8 212.41,91.76 212.41,88.9 200.98,77.47 194.94,77.47 193.68,78.74 193.68,89.53 | 220.34,99.06 208.6,99.06 204.47,103.19 C54.2 | 204.47,103.5 IC24.13 200.66,103.5 200.03,102.87 200.03,100.33 | 200.03,100.33 200.66,100.97 IC24.11 | 199.13,97.16 200.03,98.05 200.03,100.33 | U6.27 174.62,122.56 174.94,122.87 174.94,124.14 175.26,124.46 C52.2 175.58,124.46 v177.16,126.05 | v173.67,127.95 173.67,126.36 C47.2
  Bottom 0.406: CONN11.P$8 223.2,103.19 223.2,122.56 | 223.2,122.56 P36.2 | 223.2,122.56 223.2,126.05 P36.4 216.22,133.03 204.15,133.03 P35.3 | v191.45,91.76 191.13,92.08 CONN12.P$8 | P32.6 159.38,102.23 v167,102.23 | v173.67,127.95 175.58,126.05 v177.16,126.05
  other vias: 159.38,78.11 159.38,133.99 220.34,133.99 220.34,78.11
  pour Top (isolate 0.61): 154.31,139.06 225.43,139.06 225.43,73.03 154.31,73.03
  pour Bottom (isolate 0.61): 154.31,139.06 225.43,139.06 225.43,73.03 154.31,73.03
!MCLR!  (via drill 0.61)
  Top 0.406: v20.95,36.2 U1.1
  Bottom 0.406: P1.1 11.75,46.35 12.06,46.67 R1.1 12.06,46.99 13.02,46.99 13.97,47.94 24.37,47.94 25.72,46.6 25.72,38.1 23.5,35.88 21.27,35.88 v20.95,36.2
!MCLR!1  (via drill 0.61)
  Top 0.406: v97.16,36.2 U2.1
  Bottom 0.406: P7.1 87.95,46.35 88.27,46.67 R10.1 88.27,46.99 89.22,46.99 90.17,47.94 100.57,47.94 101.92,46.6 101.92,38.1 99.69,35.88 97.47,35.88 v97.16,36.2
!MCLR!2  (via drill 0.61)
  Top 0.406: v173.35,36.2 U3.1
  Bottom 0.406: P13.1 164.15,46.35 164.47,46.67 R19.1 164.47,46.99 165.42,46.99 166.37,47.94 176.77,47.94 178.12,46.6 178.12,38.1 175.9,35.88 173.67,35.88 v173.35,36.2
!MCLR!3  (via drill 0.61)
  Top 0.406: v20.95,107.31 U4.1
  Bottom 0.406: P19.1 11.75,117.47 12.06,117.79 R28.1 12.06,118.11 13.02,118.11 13.97,119.06 24.37,119.06 25.72,117.72 25.72,109.22 23.5,107 21.27,107 v20.95,107.31
!MCLR!4  (via drill 0.61)
  Top 0.406: v97.16,107.31 U5.1
  Bottom 0.406: P25.1 87.95,117.47 88.27,117.79 R37.1 88.27,118.11 89.22,118.11 90.17,119.06 100.57,119.06 101.92,117.72 101.92,109.22 99.69,107 97.47,107 v97.16,107.31
!MCLR!5  (via drill 0.61)
  Top 0.406: v173.35,107.31 U6.1
  Bottom 0.406: P31.1 164.15,117.47 164.47,117.79 R46.1 164.47,118.11 165.42,118.11 166.37,119.06 176.77,119.06 178.12,117.72 178.12,109.22 175.9,107 173.67,107 v173.35,107.31
!UART_RTS!
  Top 0.406: TP8.TP 33.66,53.34 U1.18 33.66,51.12 34.92,51.12 | 34.92,51.12 34.92,50.16 40.64,44.45 40.64,36.2 43.18,33.66 IC3.1 | 34.92,51.12 U1.17
!UART_RTS!1
  Top 0.406: TP19.TP 109.86,53.34 U2.18 109.86,51.12 111.12,51.12 | 111.12,51.12 111.12,50.16 116.84,44.45 116.84,36.2 119.38,33.66 IC8.1 | 111.12,51.12 U2.17
!UART_RTS!2
  Top 0.406: TP31.TP 186.06,53.34 U3.18 186.06,51.12 187.32,51.12 | 187.32,51.12 187.32,50.16 193.04,44.45 193.04,36.2 195.58,33.66 IC12.1 | 187.32,51.12 U3.17
!UART_RTS!3
  Top 0.406: TP43.TP 33.66,124.46 U4.18 33.66,122.24 34.92,122.24 | 34.92,122.24 34.92,121.28 40.64,115.57 40.64,107.31 43.18,104.78 IC16.1 | 34.92,122.24 U4.17
!UART_RTS!4
  Top 0.406: TP55.TP 109.86,124.46 U5.18 109.86,122.24 111.12,122.24 | 111.12,122.24 111.12,121.28 116.84,115.57 116.84,107.31 119.38,104.78 IC20.1 | 111.12,122.24 U5.17
!UART_RTS!5
  Top 0.406: TP67.TP 186.06,124.46 U6.18 186.06,122.24 187.32,122.24 | 187.32,122.24 187.32,121.28 193.04,115.57 193.04,107.31 195.58,104.78 IC24.1 | 187.32,122.24 U6.17
+3V1  (via drill 0.61)
  Top 0.406: 144.15,38.42 R13.2 | 127.64,50.16 U$2.VDD | 127.64,51.75 127.64,52.7 IC2.8 | 128.27,33.66 C18.1 | 122.24,51.75 121.92,51.75 R12.2 | 122.24,51.75 124.46,51.75 C8.1 124.78,51.75 | R11.2 119.38,52.07 121.92,52.07 R12.2 | 125.41,33.66 IC8.14 | 122.24,51.75 R12.2 | C10.+ 84.45,14.61 | 107.31,36.83 106.05,36.83 | 106.05,36.83 103.5,36.83 R16.1 | 106.05,36.83 C17.1 | 107.31,36.83 112.08,36.83 113.03,37.78 113.03,39.05 112.71,39.37 v112.71,39.69 112.71,40.96 112.39,41.27 U2.13 | 107.31,36.83 C5.1 | 97.47,53.34 97.16,53.02 | 98.11,58.1 98.74,57.47 98.74,55.56 99.06,55.24 C7.1 | 98.11,58.1 96.65,58.1 96.2,57.65 96.2,54.61 97.47,53.34 | 97.47,53.34 C16.1 | 98.11,58.1 99.38,59.37 v99.38,61.91
  Top 0.813: 144.15,38.42 145.41,39.69 P12.1 | 127.64,51.75 127.64,50.16 | IC8.14 128.27,33.66 | 125.41,33.66 122.24,36.83 122.24,51.75 | 127.64,51.75 124.78,51.75 | P11.4 129.79,59.46 129.79,53.43 127.64,51.75 | TP24.TP C10.+ | 84.45,20.95 86.04,20.95 | 86.04,20.95 IC5.2 | 84.45,20.95 IC5.4 | 84.45,14.61 84.45,20.95 | 97.16,53.02 U2.28 | 86.04,50.48 89.53,53.98 P10.4 | 86.04,50.48 P7.3 | 86.04,20.95 86.08,37.87 86.08,42.55 88.27,44.73 88.27,48.26 86.04,50.48
  Bottom 0.406: 87.95,48.9 88.27,48.58 R10.2 87.95,48.9 | P7.3 87.95,48.9 | P9.6 109.54,61.91 v99.38,61.91 91.12,61.91 P10.4 | 87.95,48.9 103.5,48.9
  Bottom 0.813: 143.51,50.8 133.99,60.33 P11.4 | 143.51,50.8 P12.1 | 103.5,48.9 v112.71,39.69 122.7,39.68 123.9,40.88 124.94,41.91 127.37,41.91 129.59,39.69 132.4,39.69 143.51,50.8
+3V2  (via drill 0.61)
  Top 0.406: 220.34,38.42 R22.2 | 203.84,50.16 U$3.VDD | 203.84,51.75 203.84,52.7 IC9.8 | 204.47,33.66 C27.1 | 198.44,51.75 198.12,51.75 R21.2 | 198.44,51.75 200.66,51.75 C21.1 200.98,51.75 | R20.2 195.58,52.07 198.12,52.07 R21.2 | 201.61,33.66 IC12.14 | 198.44,51.75 R21.2 | 160.66,14.61 C22.+ | 183.51,36.83 182.25,36.83 | 182.25,36.83 179.71,36.83 R25.1 | 182.25,36.83 C26.1 | 183.51,36.83 188.28,36.83 189.23,37.78 189.23,39.05 188.91,39.37 v188.91,39.69 188.91,40.96 188.59,41.27 U3.13 | 183.51,36.83 C19.1 | 173.67,53.34 173.35,53.02 | 174.31,58.1 174.94,57.47 174.94,55.56 175.26,55.24 C20.1 | 174.31,58.1 172.85,58.1 172.4,57.65 172.4,54.61 173.67,53.34 | 173.67,53.34 C25.1 | 174.31,58.1 175.58,59.37 v175.58,61.91
  Top 0.813: 220.34,38.42 221.62,39.69 P18.1 | 203.84,51.75 203.84,50.16 | IC12.14 204.47,33.66 | 201.61,33.66 198.44,36.83 198.44,51.75 | 203.84,51.75 200.98,51.75 | P17.4 205.99,59.46 205.99,53.43 203.84,51.75 | C22.+ TP36.TP | 162.24,20.95 160.66,20.95 | 162.24,20.95 IC10.2 | 160.66,20.95 IC10.4 | 160.66,20.95 160.66,14.61 | 173.35,53.02 U3.28 | 162.24,50.48 165.74,53.98 P16.4 | P13.3 162.24,50.48 | 162.24,20.95 162.28,37.87 162.28,42.55 164.47,44.73 164.47,48.26 162.24,50.48
  Bottom 0.406: 164.15,48.9 164.47,48.58 R19.2 164.15,48.9 | 164.15,48.9 P13.3 | P15.6 185.74,61.91 v175.58,61.91 167.32,61.91 P16.4 | 179.71,48.9 164.15,48.9
  Bottom 0.813: 219.71,50.8 210.19,60.33 P17.4 | 219.71,50.8 P18.1 | 179.71,48.9 v188.91,39.69 198.9,39.68 200.1,40.88 201.14,41.91 203.57,41.91 205.79,39.69 208.6,39.69 219.71,50.8
+3V3  (via drill 0.61)
  Top 0.406: 67.94,38.42 R6.2 | 51.44,50.16 U$1.VDD | 51.44,51.75 51.44,52.7 IC1.8 | 52.07,33.66 C2.1 | 46.04,51.75 45.72,51.75 R4.2 | 46.04,51.75 48.26,51.75 C9.1 48.58,51.75 | R3.2 43.18,52.07 45.72,52.07 R4.2 | 49.21,33.66 IC3.14 | 46.04,51.75 R4.2 | C12.+ 8.26,14.61 | 31.11,36.83 29.84,36.83 | 29.84,36.83 27.3,36.83 R2.1 | 29.84,36.83 C1.1 | 31.11,36.83 35.88,36.83 36.83,37.78 36.83,39.05 36.51,39.37 v36.51,39.69 36.51,40.96 36.2,41.27 U1.13 | 31.11,36.83 C3.1 | 21.27,53.34 20.95,53.02 | 21.91,58.1 22.54,57.47 22.54,55.56 22.86,55.24 C6.1 | 21.91,58.1 20.45,58.1 20,57.65 20,54.61 21.27,53.34 | 21.27,53.34 C4.1 | 21.91,58.1 23.18,59.37 v23.18,61.91
  Top 0.813: 67.94,38.42 69.22,39.69 P5.1 | 51.44,51.75 51.44,50.16 | IC3.14 52.07,33.66 | 49.21,33.66 46.04,36.83 46.04,51.75 | 51.44,51.75 48.58,51.75 | P4.4 53.59,59.46 53.59,53.43 51.44,51.75 | TP13.TP C12.+ | 8.26,20.95 9.84,20.95 | 9.84,20.95 IC7.2 | 8.26,20.95 IC7.4 | 8.26,14.61 8.26,20.95 | 20.95,53.02 U1.28 | 9.84,50.48 13.34,53.98 P3.4 | 9.84,50.48 P1.3 | 9.84,20.95 9.88,37.87 9.88,42.55 12.06,44.73 12.06,48.26 9.84,50.48
  Bottom 0.406: 11.75,48.9 12.06,48.58 R1.2 11.75,48.9 | P1.3 11.75,48.9 | P2.6 33.34,61.91 v23.18,61.91 14.92,61.91 P3.4 | 11.75,48.9 27.3,48.9
  Bottom 0.813: 67.31,50.8 57.78,60.33 P4.4 | 67.31,50.8 P5.1 | 27.3,48.9 v36.51,39.69 46.5,39.68 47.7,40.88 48.74,41.91 51.17,41.91 53.4,39.69 56.2,39.69 67.31,50.8
+3V4  (via drill 0.61)
  Top 0.406: 67.94,109.54 R31.2 | 51.44,121.28 U$4.VDD | 51.44,122.87 51.44,123.83 IC13.8 | 52.07,104.78 C36.1 | 46.04,122.87 45.72,122.87 R30.2 | 46.04,122.87 48.26,122.87 C30.1 48.58,122.87 | R29.2 43.18,123.19 45.72,123.19 R30.2 | 49.21,104.78 IC16.14 | 46.04,122.87 R30.2 | C31.+ 8.26,85.72 | 31.11,107.95 29.84,107.95 | 29.84,107.95 27.3,107.95 R34.1 | 29.84,107.95 C35.1 | 31.11,107.95 35.88,107.95 36.83,108.9 36.83,110.17 36.51,110.49 v36.51,110.81 36.51,112.08 36.2,112.39 U4.13 | 31.11,107.95 C28.1 | 21.27,124.46 20.95,124.14 | 21.91,129.22 22.54,128.59 22.54,126.68 22.86,126.36 C29.1 | 21.91,129.22 20.45,129.22 20,128.77 20,125.73 21.27,124.46 | 21.27,124.46 C34.1 | 21.91,129.22 23.18,130.49 v23.18,133.03
  Top 0.813: 67.94,109.54 69.22,110.81 P24.1 | 51.44,122.87 51.44,121.28 | IC16.14 52.07,104.78 | 49.21,104.78 46.04,107.95 46.04,122.87 | 51.44,122.87 48.58,122.87 | P23.4 53.59,130.58 53.59,124.55 51.44,122.87 | TP48.TP C31.+ | 8.26,92.08 9.84,92.08 | 9.84,92.08 IC14.2 | 8.26,92.08 IC14.4 | 8.26,85.72 8.26,92.08 | 20.95,124.14 U4.28 | 9.84,121.6 13.34,125.09 P22.4 | 9.84,121.6 P19.3 | 9.84,92.08 9.88,108.99 9.88,113.67 12.06,115.85 12.06,119.38 9.84,121.6
  Bottom 0.406: 11.75,120.02 12.06,119.7 R28.2 11.75,120.02 | P19.3 11.75,120.02 | P21.6 33.34,133.03 v23.18,133.03 14.92,133.03 P22.4 | 11.75,120.02 27.3,120.02
  Bottom 0.813: 67.31,121.92 57.78,131.44 P23.4 | 67.31,121.92 P24.1 | 27.3,120.02 v36.51,110.81 46.5,110.8 47.7,112 48.74,113.03 51.17,113.03 53.4,110.81 56.2,110.81 67.31,121.92
+3V5  (via drill 0.61)
  Top 0.406: 144.15,109.54 R40.2 | 127.64,121.28 U$5.VDD | 127.64,122.87 127.64,123.83 IC17.8 | 128.27,104.78 C45.1 | 122.24,122.87 121.92,122.87 R39.2 | 122.24,122.87 124.46,122.87 C39.1 124.78,122.87 | R38.2 119.38,123.19 121.92,123.19 R39.2 | 125.41,104.78 IC20.14 | 122.24,122.87 R39.2 | 84.45,85.72 C40.+ | 107.31,107.95 106.05,107.95 | 106.05,107.95 103.5,107.95 R43.1 | 106.05,107.95 C44.1 | 107.31,107.95 112.08,107.95 113.03,108.9 113.03,110.17 112.71,110.49 v112.71,110.81 112.71,112.08 112.39,112.39 U5.13 | 107.31,107.95 C37.1 | 97.47,124.46 97.16,124.14 | 98.11,129.22 98.74,128.59 98.74,126.68 99.06,126.36 C38.1 | 98.11,129.22 96.65,129.22 96.2,128.77 96.2,125.73 97.47,124.46 | 97.47,124.46 C43.1 | 98.11,129.22 99.38,130.49 v99.38,133.03
  Top 0.813: 144.15,109.54 145.41,110.81 P30.1 | 127.64,122.87 127.64,121.28 | IC20.14 128.27,104.78 | 125.41,104.78 122.24,107.95 122.24,122.87 | 127.64,122.87 124.78,122.87 | P29.4 129.79,130.58 129.79,124.55 127.64,122.87 | C40.+ TP60.TP | 86.04,92.08 84.45,92.08 | 86.04,92.08 IC18.2 | 84.45,92.08 IC18.4 | 84.45,92.08 84.45,85.72 | 97.16,124.14 U5.28 | 86.04,121.6 89.53,125.09 P28.4 | P25.3 86.04,121.6 | 86.04,92.08 86.08,108.99 86.08,113.67 88.27,115.85 88.27,119.38 86.04,121.6
  Bottom 0.406: 87.95,120.02 88.27,119.7 R37.2 87.95,120.02 | 87.95,120.02 P25.3 | P27.6 109.54,133.03 v99.38,133.03 91.12,133.03 P28.4 | 103.5,120.02 87.95,120.02
  Bottom 0.813: 143.51,121.92 133.99,131.44 P29.4 | 143.51,121.92 P30.1 | 103.5,120.02 v112.71,110.81 122.7,110.8 123.9,112 124.94,113.03 127.37,113.03 129.59,110.81 132.4,110.81 143.51,121.92
+3V6  (via drill 0.61)
  Top 0.406: 220.34,109.54 R49.2 | 203.84,121.28 U$6.VDD | 203.84,122.87 203.84,123.83 IC21.8 | 204.47,104.78 C54.1 | 198.44,122.87 198.12,122.87 R48.2 | 198.44,122.87 200.66,122.87 C48.1 200.98,122.87 | R47.2 195.58,123.19 198.12,123.19 R48.2 | 201.61,104.78 IC24.14 | 198.44,122.87 R48.2 | 160.66,85.72 C49.+ | 183.51,107.95 182.25,107.95 | 182.25,107.95 179.71,107.95 R52.1 | 182.25,107.95 C53.1 | 183.51,107.95 188.28,107.95 189.23,108.9 189.23,110.17 188.91,110.49 v188.91,110.81 188.91,112.08 188.59,112.39 U6.13 | 183.51,107.95 C46.1 | 173.67,124.46 173.35,124.14 | 174.31,129.22 174.94,128.59 174.94,126.68 175.26,126.36 C47.1 | 174.31,129.22 172.85,129.22 172.4,128.77 172.4,125.73 173.67,124.46 | 173.67,124.46 C52.1 | 174.31,129.22 175.58,130.49 v175.58,133.03
  Top 0.813: 220.34,109.54 221.62,110.81 P36.1 | 203.84,122.87 203.84,121.28 | IC24.14 204.47,104.78 | 201.61,104.78 198.44,107.95 198.44,122.87 | 203.84,122.87 200.98,122.87 | P35.4 205.99,130.58 205.99,124.55 203.84,122.87 | C49.+ TP72.TP | 162.24,92.08 160.66,92.08 | IC22.2 162.24,92.08 | 160.66,92.08 IC22.4 | 160.66,92.08 160.66,85.72 | 173.35,124.14 U6.28 | 162.24,121.6 165.74,125.09 P34.4 | 162.24,121.6 P31.3 | 162.24,92.08 162.28,108.99 162.28,113.67 164.47,115.85 164.47,119.38 162.24,121.6
  Bottom 0.406: 164.15,120.02 164.47,119.7 R46.2 164.15,120.02 | P31.3 164.15,120.02 | P33.6 185.74,133.03 v175.58,133.03 167.32,133.03 P34.4 | 164.15,120.02 179.71,120.02
  Bottom 0.813: 219.71,121.92 210.19,131.44 P35.4 | 219.71,121.92 P36.1 | 179.71,120.02 v188.91,110.81 198.9,110.8 200.1,112 201.14,113.03 203.57,113.03 205.79,110.81 208.6,110.81 219.71,121.92
+5V  (via drill 0.61)
  Top 0.406: IC4.8 20.64,29.21 C11.1 20.64,29.53 | TP12.TP 12.7,23.5 IC7.3 | 17.14,23.5 C13.+ 17.14,23.18 | 37.78,34.61 39.37,34.61 R7.1 | 37.78,34.61 36.2,34.61 R8.1 | 37.78,34.61 37.78,20.95 35.24,18.41 | P5.3 70.8,52.39 v70.8,22.54
  Top 0.813: 12.7,23.5 17.14,23.5 17.14,25.72 20.64,29.21 | 35.24,18.41 CONN2.P$7 33.34,17.46 33.34,7.3 | 17.14,23.18 20.32,20 20.32,13.02 25.4,7.3 33.34,7.3 | 33.34,7.3 v36.2,5.08
  Bottom 0.406: v70.8,22.54 66.04,18.41 CONN1.P$7 57.47,17.46 57.47,7.62 D2.2 57.15,7.3 55.56,5.08 v36.2,5.08
+5V1  (via drill 0.61)
  Top 0.406: IC6.8 96.84,29.21 C15.1 96.84,29.53 | TP23.TP 88.9,23.5 IC5.3 | 93.34,23.5 C14.+ 93.34,23.18 | 113.98,34.61 115.57,34.61 R14.1 | 113.98,34.61 112.39,34.61 R15.1 | 113.98,34.61 113.98,20.95 111.44,18.41 | P12.3 147,52.39 v147,22.54
  Top 0.813: 88.9,23.5 93.34,23.5 93.34,25.72 96.84,29.21 | 111.44,18.41 CONN4.P$7 109.54,17.46 109.54,7.3 | 93.34,23.18 96.52,20 96.52,13.02 101.6,7.3 109.54,7.3 | 109.54,7.3 v112.39,5.08
  Bottom 0.406: v147,22.54 142.24,18.41 CONN3.P$7 133.67,17.46 133.67,7.62 D5.2 133.35,7.3 131.76,5.08 v112.39,5.08
+5V2  (via drill 0.61)
  Top 0.406: IC11.8 173.04,29.21 C24.1 173.04,29.53 | TP35.TP 165.1,23.5 IC10.3 | 169.54,23.5 C23.+ 169.54,23.18 | 190.18,34.61 191.77,34.61 R23.1 | 190.18,34.61 188.59,34.61 R24.1 | 190.18,34.61 190.18,20.95 187.64,18.41 | P18.3 223.2,52.39 v223.2,22.54
  Top 0.813: 165.1,23.5 169.54,23.5 169.54,25.72 173.04,29.21 | 187.64,18.41 CONN6.P$7 185.74,17.46 185.74,7.3 | 169.54,23.18 172.72,20 172.72,13.02 177.8,7.3 185.74,7.3 | v188.59,5.08 185.74,7.3
  Bottom 0.406: v223.2,22.54 218.44,18.41 CONN5.P$7 209.87,17.46 209.87,7.62 D8.2 209.55,7.3 207.96,5.08 v188.59,5.08